# EAGLE board SCMount (EAGLE 5.09)
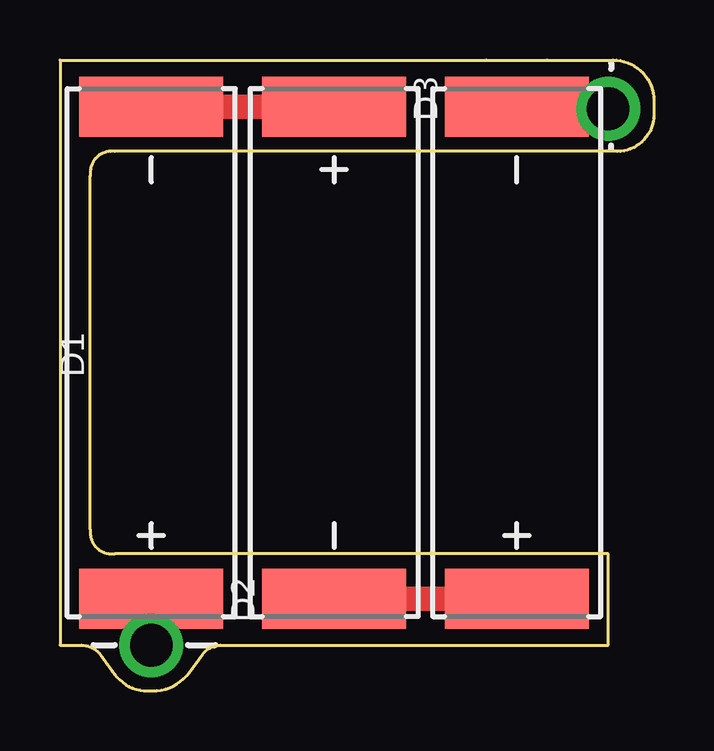
[diagram p0: board, top side]

Size 24.77 x 26.29 mm. Coordinates in mm from the lower left corner, seen from the top.
Outline: 0,1.91 0.89,1.91 arc-54 1.69,1.5 2.28,0.7 arc54 3.66,0 3.88,0 arc54 5.39,0.77 5.95,1.53 arc-54 6.69,1.91 22.86,1.91 22.86,5.71 2.29,5.71 arc-106 1.27,6.73 1.27,21.46 arc-106 2.29,22.48 23.24,22.48 arc90 24.77,24.01 24.77,24.58 arc90 23.06,26.29 0,26.29 0,1.91
Copper layers (1*16): Top 0.0178mm / dielectric 1.4986mm / Bottom 0.0178mm
Design rules "SSC-EAGLE-2Lyr_v1.0.0.3": minimum track width 6mil, minimum drill 14mil, track to track 6mil, track to pad 6mil, pad to pad 6mil, via to via 6mil, smd to smd 6mil, copper to edge 20mil, drill to drill 16mil, minimum pad ring 8mil, minimum via ring 8mil, stop-mask expansion 3mil, vias tented up to drill 0mil, thermal gap 10mil

## Footprints (pad centres in the part's own frame; a part is rotated, then mirrored left to right if it is on the bottom)
XOB17-04X3 = smd 2.5 x 6: + -10.25,0; - 10.25,0

## Placement (x,y rotation side)
D1  XOB17-04X3  [XOB17-04X3]  3.81,14.1 90 top
D2  XOB17-04X3  [XOB17-04X3]  11.43,14.1 270 top
D3  XOB17-04X3  [XOB17-04X3]  19.05,14.1 90 top

## Library data of the parts
D1-D3 = umich

## Nets
GND: D3.-
N$1: D2.- D3.+
N$2: D1.- D2.+
VCC: D1.+

## Tracks (layer width: path | path; a pad name or v marks a point on that pad's centre or on a via)
GND  (via drill 1.78)
  Top 1.016: D3.- 22.86,24.35 v22.86,24.26
N$1
  Top 1.016: D2.- D3.+
N$2
  Top 1.016: D1.- 10.92,24.35 10.92,24.51 11.43,24.51 D2.+
VCC  (via drill 1.78)
  Top 1.016: D1.+ v3.81,1.91